# Altium PCB ESP32 Custom.PcbDoc (part 2 of 2)
Units mil, origin at the board's own origin, x right, y up, seen from the top; angles counter-clockwise.
Board outline 2700 x 1000 mil, 4 copper layers (L1, L2, L3, L4), stack 61.583 mil thick; 64 components, 73 nets, 299 pads, 161 vias.
Unrouted connection lines stored in the file: 215.
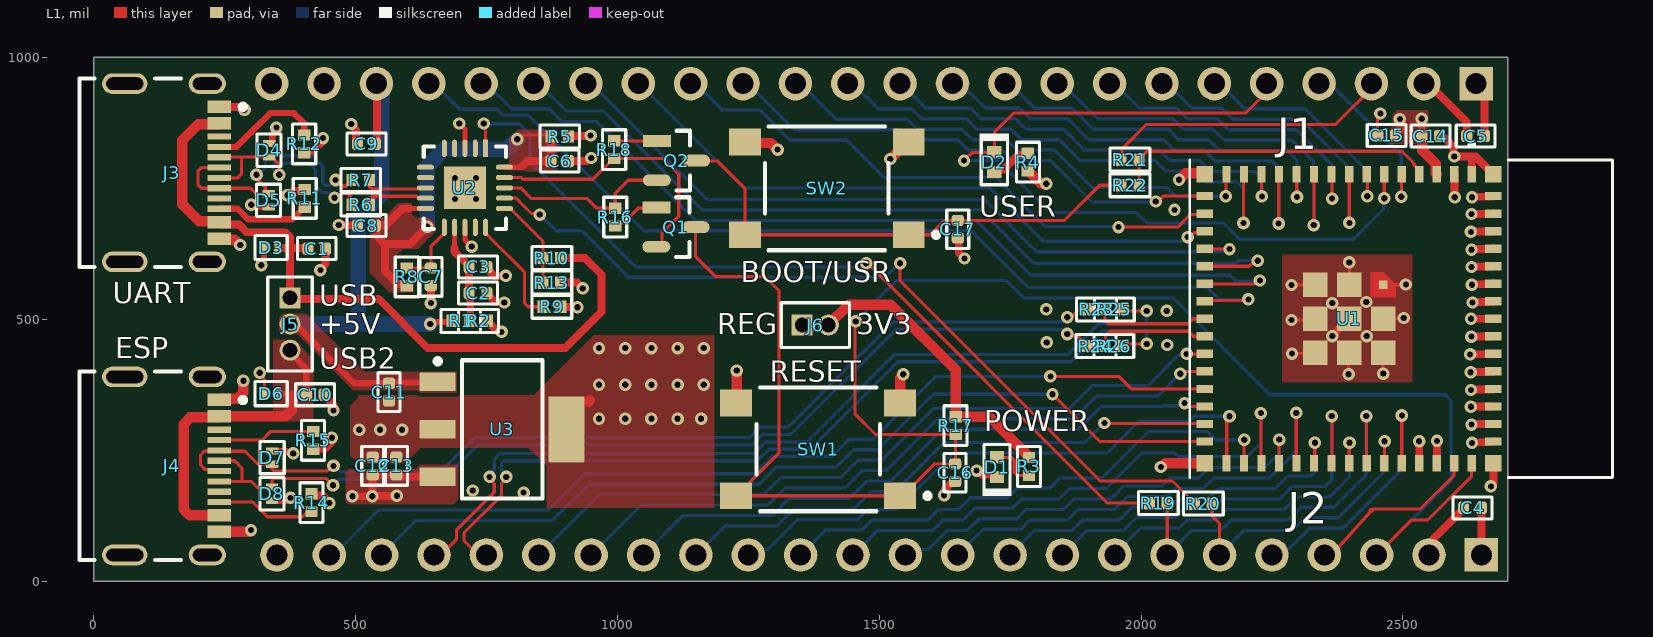
[diagram p0: L1 view]

## Part data (continued)
U3: "IC REG LINEAR 3.3V 1.5A SOT223-4", Case/Package=SOP, Dropout Voltage1-Max=550mV, Dropout Voltage1-Nom=340mV, LCSC Part Number=C181262, Manufacturer="Texas Instruments", Max Supply Voltage=20V, Min Input Voltage=3.8V, Operating Temperature, TJ-Max=125°C, Operating Temperature, TJ-Min=-40°C, Output Current1-Max=1.5A, Output Voltage1-Max=3.4V, Output Voltage1-Min=3.2V, Output Voltage1-Nom=3.3V, Package Body Material=Plastic, Package Shape=Rectangular, Package Style="SMALL OUTLINEMeter", Peak Reflow Temperature (Cel)=260°C, Supplier Part Number=296-24897-1-ND, Voltage Tolerance-Max=3%, Adjustability=FIXED, Category="Voltage Regulators - Linear", Channels=1, ComponentLink1Description=https://www.ti.com:443/lit/ds/symlink/tl1963a.pdf?src-supplier=IHS+Markit, ComponentLink1URL=https://www.ti.com:443/lit/ds/symlink/tl1963a.pdf?src-supplier=IHS+Markit, ComponentLink2Description=https://datasheet.ciiva.com/2046/-2046068.pdf?src-supplier=Digikey, ComponentLink2URL=https://datasheet.ciiva.com/2046/-2046068.pdf?src-supplier=Digikey, Height - Seated (Max)=1.8mm, JESD-30 Code=R-PDSO-G4, JESD-609 Code=e3, Length=6.5mm, Line Regulation-Max=0.01%, Load Regulation-Max=0.07%, Manufacturer Part Number=TL1963A-33DCYR, Moisture Sensitivity Level=2, Number of Outputs=1, Packaging="Tape and Reel", Pins=4, Pricing="1=2.91, 10=2.614, 25=2.4712, 100=2.1417, 250=2.03188, 500=1.8232, 1000=1.53764 (USD)", Qualification Status="Not Qualified", Reach SVHC Compliant=Yes, Regulator Type="FIXED POSITIVE SINGLE OUTPUT LDO REGULATOR", RoHS=Yes, RoHS Compliant=Yes, Stock=4105, Supplier=Digikey, Surface Mount=Yes, Technology=BIPOLAR, Terminal Finish=Tin, Terminal Form="Gull Wing", Terminal Pitch=2.3mm, Terminal Position=DUAL, Width=3.5mm, Input Voltage Absolute-Max=20V

## Via types
v1: diameter 23.62, hole 11.81, L1 to L4, tented both sides, 124 vias
v2: diameter 24, hole 12, L1 to L4, tented both sides, 37 vias

## Nets (pads, with @x,y where several pads share a name; then routed paths per layer and width w, separated by ;. In a path a pad name is that pad's centre, name@x,y a point inside that pad or via, vN(x,y) a via of type N, cw(c..) or ccw(c..) an arc to the next point about the centre after c; other vN are vias at no path point)
+3V3: C4.2 C5.2 C14.2 C15.2 J1.2 J2.1 J6.2 R2.1 R3.2 R4.2 R5.1 R17.2 U1.3 | length 4477.5
  L1 w15: R2.1 752.01,495.82 771.83,476 v1(779,476) ; R5.1 908.01,850 948,850 v1(949,851) ; C15.2 2485.93,852.18 2494.38,860.63 v1(2494.38,882.62) ; v1(2536,883) 2536.07,882.93 C14.2 ; J1.2@2550,950 2550,949 2622.07,876.93 C5.2 ; C4.2 2649.93,50.07 J2.1
  L1 w20: J6.2 1403,489.25 1441.75,528 1521.56,528 1646,403.56 R17.2 1709.89,314.01 1784.19,239.71 1784.19,236.64 1784.82,236.01 R3.2 ; R4.2 1784.63,782.36 1785.81,782.36 1808.48,759.69 1818.31,759.69 v1(1819,759) ; C14.2 2536.7,849.37 2536.7,823.06 2562.61,797.16 2562.61,778.72 U1.3
  L2 w15: v1(2494.38,882.62) 2494.57,882.81 2535.81,882.81 v1(2536,883)
  L2 w20: 2503,822 2567.15,757.85 2567.15,449.39 2596.88,419.65 2596.88,207.12 2650,154 J2.1
  L2 w40: v1(779,476) 787.13,476 828.81,517.68 828.81,609.36 814.19,623.98 814.19,651 814.19,779.19 819,784 886,851 971.13,851 972.13,850 1028,850 1145,733 1404,733 ; J6.2 1404,490 1404,733 ; J1.2@2550,950 2545.41,945.41 2545.41,892.41 v1(2536,883) 2536,855 2503,822 1882,822 v1(1819,759) 1793,733 1404,733
+3V3_FTDI: C6.2 C8.2 R5.2 R8.1 U2.10 U2.20 | length 868.7
  L1 w6: v1(809,844) 811.61,846.61 815.61,846.61 819,850 821,852 869.99,852 R5.2
  L1 w10.01: 601,711.63 U2.10 ; U2.20 816.19,790.37 819,793.18
  L1 w15: 557.94,679 C8.2 539.94,676.98 539.94,660.06 556,644 ; 557.94,679.94 589.63,711.63 601,711.63 ; R8.1 594.87,567.12 581.7,567.12 556,592.82 556,644 ; v2(637,677) 604,644 556,644 ; 819,793.18 827.82,802 C6.2 873.03,802.04 R5.2 R5.2
  L4 w30: v2(637,677) 637,792 670,825 790,825 v1(809,844)
+3V3_REG: C12.2 C13.2 J6.1 U3.3 | length 1227.2
  L1 w15: v1(494,162) v1(532,162) v1@532.5,162.5 ; v1@578.5,163.5 v1(579,163) 578.5,162.5 v1@532.5,162.5 ; C13.2@578.5,202.57 C13.2 C12.2 532.5,202.57 v1@532.5,162.5 ; C13.2@579.18,203.07 582.8,199.45 U3.3
  L2 w15: v1(494,162) 494.5,162.5 v1@532,162.5
  L2 w40: v1(579,163) 599,163 649,213 ; 1300.36,443.36 1346,489 J6.1
  L2 w60: 649,213 693,257 1170,257 1297,384 1297,440
+5V: C9.2 C11.2 J1.22 J5.2 R1.1 U3.1 | length 1242.1
  L1 w12: J5.2@375,500 375.91,500 497.98,377.93 C11.2 565.31,379.24 655.66,379.24 U3.1 ; v2(643,491) 646.25,491 650.25,495 681.99,495 R1.1
  L1 w15: C9.2 541.06,838.13 541.06,941.06 J1.22@550,950
  L4 w30: J5.2@376,490 377,491 505,491 ; J1.22@550,950 550,738.4 505,693.4 505,491 ; v2(643,491) 505,491
+5V_VBUS1: C1.2 D3.2 J3.A4B9 J3.B4A9 J5.1 R10.2 | length 1440.8
  L1 w15: J3.B4A9 243.95,681.12 277.42,681.12 292.17,666.37 365.63,666.37 375,657 375,634.03 ; D3.2 351.55,636.64 352.16,636.03 377,636.03 ; C1.2 408.04,636.03 377,636.03 ; R10.2 938,617 970,585 970,515 900,445 638.18,445 544.18,539 377,539 J5.1 375,634.03 ; 375,634.03 377,636.03
  L1 w20: J3.B4A9 237.83,687.24 201.47,687.24 169,719.72 169,842 199.6,872.6 237.83,872.6 J3.A4B9
+5V_VBUS2: C10.2 D6.2 J4.A4B9 J4.B4A9 J5.3 | length 633.3
  L1 w12: D6.2@352.16,356.99 378,356.99 C10.2@405.08,356.99 ; J5.3 375,437 406.07,405.93 C10.2
  L1 w15: D6.2 351.55,357.6 D6.2@352.16,356.99 ; C10.2@405.08,356.99 C10.2
  L1 w20: J4.B4A9 183.41,125.59 178,131 171.69,137.31 171.69,299.69 184.76,312.76 237.83,312.76 J4.A4B9 366.28,314.57 378,326.28 378,353.68
+VCC_FTDI: C2.2 C3.2 R1.2 R2.2 U2.12 | length 191.1
  L1 w10.01: 689,636 689.22,636.22 689.22,675.49 U2.12
  L1 w15: 689,636 689,629.25 717.07,601.18 C3.2 C2.2 718.99,548.08 R2.2@718.99,497
BTN_GPIO0: C17.2 Q2.3 R22.1 SW2.1 SW2.2 | length 961.6
  L1 w6: Q2.3 1151.42,802 1192,802 1243.5,750.5 SW2.2 SW2.1 1597.42,661.42 1624.93,688.93 C17.2 1853.93,688.93 1921,756 R22.1
CHIP_PU: C16.2 J2.3 Q1.3 R17.1 SW1.1 SW1.2 U1.45 | length 3442.9
  L1 w6: Q1.3 1149.42,619.58 1187,582 1281,582 1309,554 1309,244.99 1252.52,188.51 1252.52,183.59 1231.93,163 SW1.2 SW1.1 1544.92,163 1605.85,223.93 C16.2 1645.5,224.43 1645.5,279.49 R17.1 1493.01,279.99 1454,319 1454,495 v2(1455,496) ; J2.3 2517,117 2548,117 2631.29,200.29 2631.29,225.04 U1.45
  L4 w6: v2(1455,496) 1519.19,560.19 1519.47,560.19 1533.28,574 1742.86,574 1775.86,541 2060.99,541 2245.99,356 2580.92,356 2591.88,345.04 2591.88,191.88 J2.3
CON1_USB_N: D4.2 J3.A7 J3.B7 R6.1 | length 460.9
  L1 w6.03: J3.A7 275.08,770.08 282,777 282,809.72 ; J3.B7 239.91,809.72 282,809.72 ; v1(354.56,776) 354.56,795.36 339.92,810 D4.2 334.72,809.72 282,809.72 ; v1(460,732) 464.76,732 472.76,740 485,740 490,735 490,721.99 R6.1
  L4 w6.03: v1(354.56,776) 353.79,776 341.93,787.86 341.93,794.71 345.46,798.25 411.46,798.25 423.58,786.13 423.58,754.82 436.41,741.98 447.67,741.98 457.66,732 v1(460,732)
CON1_USB_P: D5.2 J3.A6 J3.B6 R7.1 | length 514.5
  L1 w6.03: J3.A6 205.76,789.76 199,783 199,757 205.61,750.39 J3.B6 239.83,750.2 299.8,750.2 311,739 330.68,739 331.47,739.8 327.6,743.67 327.6,752.2 314.44,765.36 314.44,772.36 v2(311,775.8) ; v2(462,766) 462.55,766 474.52,754.03 482.2,754.03 492.99,764.82 R7.1
  L4 w6.03: v2(311,775.8) 314.8,775.8 327.9,788.9 327.9,800.53 339.65,812.28 417.27,812.28 437.61,791.94 437.61,760.63 442.22,756.02 449.48,756.02 459.47,766 v2(462,766)
CON2_USB_N: D7.2 J4.A7 J4.B7 R23.1 | length 1917.3
  L1 w6.03: J4.A7 236.94,212.94 213.06,212.94 204,222 204,241 211.49,248.49 238.52,248.49 J4.B7 241.24,248 289,248 313.8,223.2 D7.2 341,223.03 341,213.56 344.53,210.03 445.48,210.03 455.45,220 v2(458,220) ; v2(1859,504) 1862.44,507.44 1870.44,507.44 1881.85,518.85 1897.84,518.85 R23.1
  L4 w6.03: v2(458,220) 459.03,220 470.52,208.52 562.03,208.52 563.03,207.52 661.15,207.52 727.66,274.03 1251.98,274.03 1272.06,294.11 1325.58,294.11 1526.51,495.03 1694.99,495.03 ; 1695.01,495.02 1846.48,495.02 1855.47,504 v2(1859,504)
CON2_USB_P: D8.2 J4.A6 J4.B6 R24.1 | length 1895.1
  L1 w6.03: J4.B6 283,190.55 ; J4.A6 269.08,229.92 283,216 283,190.55 ; v2(457,183) 457,183.47 444.47,196 343.98,196 340.45,192.47 D8.2 339.66,179 312,179 300.45,190.55 283,190.55 ; v2(1859,472) 1862.44,468.56 1878.61,468.56 1896.99,450.18 R24.1
  L4 w6.03: v2(457,183) 458.03,183 469.52,194.48 556.22,194.48 557.22,193.48 666.96,193.48 733.48,260 1257.79,260 1277.87,280.08 1331.39,280.08 1532.32,481 1689.18,481 1846.48,480.98 1855.47,472 v2(1859,472)
CON_ESP_USB_N: J2.21 R25.1 | length 1667
  L1 w6.03: J2.21 663,50 693.04,80.04 693.04,98.04 764.98,169.98 764.98,186.48 756,195.47 v2(756,199) ; R25.1 1969.01,516 v2(2011,516)
  L4 w6.03: v2(756,199) 756,202.53 764.98,211.52 764.98,232.28 776.74,244.03 1261.66,244.03 1283.68,266.05 1363.05,266.05 1530.03,433.03 1861.03,433.03 1919.51,491.52 2007.47,491.52 2011,495.05 v2(2011,516)
CON_ESP_USB_P: J2.20 R26.1 | length 1649.1
  L1 w6.03: J2.20 734.31,50 707.07,77.24 707.07,92.23 779.02,164.17 779.02,186.48 788,195.47 v2(788,199) ; R26.1 1969.01,453 v2(2011,453)
  L4 w6.03: v2(788,199) 788,202.53 779.02,211.52 779.02,226.47 782.55,230 1267.47,230 1289.49,252.02 1368.86,252.02 1535.84,419 1866.84,419 1925.33,477.48 2007.47,477.48 2011,473.95 2011,458.7 2008.15,455.85 v2(2011,453)
CON_GPIO0: J1.3 R21.1 | length 559.2
  L1 w6: R21.1 1963.95,806.96 1963.95,825.95 2010,872 2371,872 2449,950 J1.3@2450,950
DTR_FTDI: Q2.2 R16.1 U2.18 | length 346.5
  L1 w6: U2.18 815.5,751 836,730.5 942.5,730.5 960.99,712.01 R16.1 996,741 1020.6,765.6 Q2.2
ESP_USB_N: R23.2 R25.2 U1.23 | length 223.5
  L1 w6.23: R25.2@1931,524 1931,498 1937.62,491.38 2090.38,491.38 2100,501 U1.23
ESP_USB_P: R24.2 R26.2 U1.24 | length 215.6
  L1 w6.23: R24.2@1932.01,450 1932.01,468.01 1941.15,477.15 2089.85,477.15 2099.46,467.54 U1.24
FTDI_RESET: C7.2 R8.2 U2.11 | length 134.3
  L1 w6: R8.2 R8.2 643.96,597.97 C7.2 644,638.65 669.63,664.28 U2.11
FTDI_USB_N: R6.2 U2.9 | length 121.4
  L1 w6.03: R6.2 528,719.99 528,731.44 531.53,734.97 617.22,734.97 620.88,731.32 U2.9
FTDI_USB_P: R7.2 U2.8 | length 122.3
  L1 w6.03: R7.2 527,752.53 530.53,749 618.88,749 620.88,751 U2.8
GND: C1.1 C2.1 C3.1 C4.1 C5.1 C6.1 C7.1 C8.1 C9.1 C10.1 C11.1 C12.1 C13.1 C14.1 C15.1 C16.1 C17.1 D1.1 D3.1 D4.1 D5.1 D6.1 D7.1 D8.1 J1.1 J1.23 J2.2 J2.24 J3.A1B12 J3.B1A12 J3.S1 J3.S2 J3.S3 J3.S4 J4.A1B12 J4.B1A12 J4.S1 J4.S2 J4.S3 J4.S4 R9.2 R11.1 R12.1 R13.2 R14.1 R15.1 SW1.3 SW1.4 SW2.3 SW2.4 U1.1 U1.2 U1.42 U1.43 U1.46 U1.47 U1.48 U1.49 U1.50 U1.51 U1.52 U1.53 U1.54 U1.55 U1.56 U1.57 U1.58 U1.59 U1.60 U1.61 U1.62 U1.63 U1.64 U1.65 U1.66 U1.67 U1.68 U1.69 U1.70 U1.71 U1.72 U1.73 U2.3 U2.13 U2.21 U3.2 U3.4 | length 3311.9
  L1 w6: v1(317,398) 317,394.31 325.96,385.35 D6.1 ; v1(2287.25,498.59) 2287.65,498.98 U1.72@2330.86,498.98 ; v1(2287.25,565.59) 2287.65,565.98 U1.71@2330.86,565.98 ; v1(2288.25,434.59) 2288.65,434.98 U1.73@2331.86,434.98 ; U1.70@2396.02,438.86 2396.02,395.65 v1(2396.41,395.25) ; v1(2397.59,608.75) 2397.98,608.35 U1.69@2397.98,565.14 ; C15.1@2451.44,853.38 2451.44,883.75 2457,889.31 v1(2457,893) ; U1.67@2458.14,502.02 2501.35,502.02 v1(2501.75,502.41) ; U1.68@2462.02,439.86 2462.02,396.65 v1(2462.41,396.25) ; U1.66@2462.14,566.02 2505.35,566.02 v1(2505.75,566.41)
  L1 w10.01: v1(698,874) 709,863 U2.3 ; U2.13 709.23,675.35 709.23,651.58 v1(722,638.82)
  L1 w12: v1(301,718.8) 304.14,718.8 307.85,715.09 333.11,715.09 D5.1 ; v2(320,603) 320,606.25 325.07,611.32 325.07,636.17 D3.1 ; D4.1 335.89,836.48 340.81,836.48 340.81,854.67 349,862.86 v1(349,866) ; D7.1 341.71,247.91 367.95,247.91 369.63,246.22 378.78,246.22 v1(381,244) ; D8.1@343,153.41 367.26,153.41 372.86,159 v1(376,159)
  L1 w15: J3.A1B12 240.09,905.45 280.11,905.45 285.56,900 v2(288,900) ; v1(370,737) 372.33,737 380.21,744.88 399.87,744.88 R11.1 ; R12.1 405.13,821.12 418.3,821.12 436.35,839.17 436.35,844.35 v1(438,846) ; R14.1@415.93,167.08 419.13,163.88 436.9,163.88 450,150.78 v1(450,149) ; R15.1 420.36,253.35 441.9,253.35 453.35,264.8 453.35,272.35 v1(455,274) ; v2(433,594) 433,596.44 442.93,606.36 C1.1 ; C10.1 439.93,354.82 458,336.75 v1(458,326) ; v1(468,680) 468.5,679.5 502.57,679.5 C8.1@504.07,678 ; v1(492,873) 492,870.67 500.94,861.73 C9.1@500.94,836 ; v1(644,531) C7.1 ; C2.1 750.93,548.82 766.1,533.65 782.35,533.65 v1(784,532) ; C3.1 754.06,596.87 754.06,593.94 765,583 v1(787,583) ; R9.2 892.51,523.5 923.5,523.5 v1(924,523) ; R13.2 923,570 928.99,564.01 v1(934,559) ; C6.1 941.67,802 947.67,808 v1(950,808) ; v1(1624,164) 1625.65,165.65 1625.65,175.49 1637.1,186.94 1641.87,186.94 C16.1 ; C17.1@1651.81,654.44 1651.81,627.19 v1(1663,616) ; v1(1686,211) 1688.33,211 1696.02,203.31 1720.69,203.31 D1.1 ; v1(2365,468) 2365,468.59 U1.61 ; v1(2531,267) 2531.27,266.73 U1.42 ; J2.2 2559.38,59.38 2559.38,82.12 2616.07,138.82 C4.1 ; v1(2565.07,267.82) 2565.34,267.55 U1.43@2565.34,226.23 ; C14.1 2569.93,848.82 2573.06,845.69 2580.31,845.69 2596.35,829.65 2596.35,812.65 v1(2598,811) 2631,811 ; U1.2@2598.56,776.62 2598.56,733.4 v1(2598.96,733.01) ; v1(2628.48,433.04) 2628.75,433.31 U1.51@2673,433.31 ; v1(2629.3,398.97) 2629.57,399.24 U1.50@2670.89,399.24 ; v1(2629.82,332.93) 2630.19,333.3 2672.63,333.3 U1.48 ; v1(2629.82,666.93) 2630.52,667.63 2672.3,667.63 U1.58 ; v1(2630,365) 2631.07,366.07 2671.93,366.07 U1.49 ; v1(2630,501) U1.53 ; v1(2630.82,466.93) 2631.12,467.23 2672.7,467.23 U1.52 ; v1(2631,299) 2632.21,300.21 U1.47 ; v1(2631,600) 2631.7,600.7 2672.3,600.7 U1.56 ; v1(2631,633) 2631.93,633.93 2670.86,633.93 U1.57@2672.39,635.46 ; v1(2631,701) 2631.39,701.39 2672.61,701.39 U1.59 ; U1.1 2631.66,810.34 2631,811 ; v1(2631.82,565.93) 2632.82,566.93 2671.07,566.93 U1.55@2672.53,568.4 ; v1(2632,264) 2633.37,265.37 2671.63,265.37 U1.46 ; v1(2632,733) 2633.13,734.13 2671.01,734.13 U1.60@2671.86,734.98 ; v1(2633,532) 2634.23,533.23 2671.77,533.23 U1.54 ; J1.1@2650,950 2655.93,944.07 C5.1 ; v1(2668,181) 2668,183.33 2673,188.33 U1.65 ; U1.62 2638.59,811 2631,811
  L1 w20: J4.B1A12 296.13,94.09 299.59,97.55 v1(300.57,97.55) ; J4.A1B12 241.45,347.87 274.28,347.87 286,359.59 v1(286,382.65) ; J3.B1A12 241.45,652.13 268.89,652.13 279.02,642 v1(280,642) ; 945.27,342.99 947.28,345 ; SW1.4@1228,336.17 v1(1228,402) ; SW2.4 1245.39,836.7 1292.61,836.7 1305.31,824 v1(1306,824) ; v1(1521,806) 1557,842 1557,838.08 SW2.3 ; SW1.3 1540,388.02 1546,394.02 v1(1546,395) ; C17.1 1651.18,655.07 C17.1@1651.81,654.44 ; v1(2038,218) 2038.98,218 2046.18,225.2 2116.07,225.2 2116.28,225.41 U1.64 ; v1(2072.5,766.5) 2085,779 2119.41,779 U1.63
  other v1: 821,169 724,173 507,289 547,289 589,289 965,310 1015,310 1065,310 1115,310 1160,310 965,375 1015,375 1065,375 1115,375 1165,375 965,445 1015,445 1065,445 1115,445 1165,445 2050,451 1820,456 2431,468 2049,516 1819,519 2365,531 2430,533 2064,709 690,730 730,730 690,770 730,770
GPIO0: R21.2 R22.2 U1.4 | length 616.6
  L1 w6: R22.2 R21.2 1996.01,806.18 2001.64,811.81 2002.82,811.81 2012.01,821 2498.23,821 2520.68,798.55 2520.68,795.06 2531.27,784.46 U1.4
GPIO1: J1.4 U1.5 | length 326.3
  L1 w6: v2(2497,734) 2497.4,734.4 2497.4,776.19 U1.5
  L4 w6: J1.4@2350,950 2361,950 2497,814 v2(2497,734)
GPIO2: D2.1 J1.5 U1.6 | length 1628.9
  L1 w6: v1(1662,803) 1677.7,818.7 D2.1 1720,857 1757,894 2200,894 2250,944 J1.5@2250,950 ; v1(2464.34,731.34) U1.6
  L4 w6: v1(1662,803) 1727.29,803 1826.29,704 1990,704 1990.19,703.81 1991.11,703.81 2010.92,684 2157.39,684 2188.49,652.9 2405.08,652.9 2409.18,657 2410.14,657 2463,709.86 2463,730 v1(2464.34,731.34)
GPIO3: J1.6 U1.7 | length 442.8
  L1 w6: U1.7@2430.44,774.76 U1.7@2431.63,775.96 ; v2@2432.4,735.4 U1.7@2432.4,777.19
  L4 w6: J1.6@2150,950 2198,902 2313.28,902 2432,783.28 v2(2432,735)
GPIO4: J1.7 U1.8 | length 612.5
  L1 w6: U1.8 2397.7,776.3 2397.7,684.3 v2(2398,684)
  L4 w6: J1.7@2050,950 2097,903 2154,903 2175,882 2305,882 2398,789 v2(2398,684)
GPIO5: J1.8 U1.9 | length 582.1
  L1 w6: v2@2364.38,731.03 U1.9@2364.38,770.35
  L4 w6: J1.8@1950,950 1997,903 2068.72,903 2088.72,883 2145.72,883 2166.72,862 2296.72,862 2364.82,793.9 v2(2364.82,730.59)
GPIO6: J1.9 U1.10 | length 754.4
  L1 w6: v2@2329.97,680.19 U1.10@2329.97,772.19
  L4 w6: J1.9@1850,950 1917,883 2060.43,883 2080.43,863 2137.43,863 2158.43,842 2288.43,842 2329.67,800.76 v2(2329.67,679.89)
GPIO7: J1.10 U1.11 | length 718.2
  L1 w6: v2@2297.38,734.03 U1.11@2297.38,773.35
  L4 w6: J1.10@1750,950 1797,903 1868.72,903 1908.72,863 2052.15,863 2072.15,843 2129.15,843 2150.15,822 2280.15,822 2297.82,804.33 v2(2297.82,733.59)
GPIO8: J1.11 U1.12 | length 877.9
  L1 w6: v2@2262.97,683.19 U1.12@2262.97,775.19
  L4 w6: J1.11@1650,950 1656,950 1703,903 1768.72,903 1788.72,883 1860.43,883 1900.43,843 2043.86,843 2063.86,823 2120.86,823 2141.86,802 2250.35,802 2262.67,789.67 v2(2262.67,682.89)
GPIO9: J1.12 U1.13 | length 834.5
  L1 w6: v2@2230.38,735.03 U1.13@2230.38,774.35
  L4 w6: J1.12@1550,950 1550,942 1589,903 1674.72,903 1694.72,883 1760.43,883 1780.43,863 1852.15,863 1892.15,823 2035.58,823 2055.58,803 2112.58,803 2133.58,782 2218.35,782 2230.82,769.53 v2(2230.82,734.59)
GPIO10: J1.13 U1.14 | length 986.4
  L1 w6: v2@2195.97,684.19 U1.14@2195.97,776.19
  L4 w6: J1.13@1450,950 1498,902 1561.72,902 1580.72,883 1666.43,883 1686.43,863 1752.15,863 1772.15,843 1843.86,843 1883.86,803 2027.29,803 2047.29,783 2104.29,783 2125.29,762 2183.28,762 2195.67,749.61 v2(2195.67,683.89)
GPIO11: J1.14 U1.15 | length 943
  L1 w6: v2(2162,735) 2162.58,735.58 2162.58,775.55 U1.15@2163.38,776.35
  L4 w6: J1.14@1350,950 1418,882 1553.43,882 1572.43,863 1658.15,863 1678.15,843 1743.86,843 1763.86,823 1835.58,823 1906.73,751.85 2049.14,751.85 2052.99,748 2053.08,748 2066.08,735 v2(2162,735)
GPIO12: J1.15 U1.16 | length 970.1
  L1 w6: v1(2028,725) 2030.61,727.61 2034.61,727.61 2042.25,735.25 U1.16
  L4 w6: J1.15@1250,950 1338,862 1545.15,862 1564.15,843 1649.86,843 1669.86,823 1735.58,823 1755.58,803 1827.29,803 1906.29,724 2027,724 v1(2028,725)
GPIO13: J1.16 U1.17 | length 1093.6
  L1 w6: v1(1957,676) 2070.08,676 2094.47,700.39 2120.42,700.39 U1.17
  L4 w6: J1.16@1150,950 1200,900 1271.72,900 1329.72,842 1438,842 1509,771 1723,771 1817,677 v1@1955,677
GPIO14: J1.17 U1.18 | length 1209.2
  L1 w6: v1(2089,657) 2092.69,657 2101.13,665.45 2118.94,665.45 U1.18
  L4 w6: J1.17@1050,950 1050,942 1241,751 1711,751 1813,649 2077.31,649 2085.31,657 v1(2089,657)
GPIO15: J1.18 U1.19 | length 1401.6
  L1 w6: U1.19 2122.25,634.43 2168.57,634.43 v1(2169,634)
  L4 w6: J1.18@950,950 1171,729 1701,729 1801,629 2156.33,629 2158.72,631.39 2166.39,631.39 v1(2169,634)
GPIO16: J1.19 U1.20 | length 1622.9
  L1 w6: U1.20 2122.02,601.2 2206.51,601.2 2214.71,609.39 2220.39,609.39 v1(2223,612)
  L4 w6: J1.19@850,950 902,898 973,898 1162,709 1692.72,709 1794.72,607 2179.92,607 2184.92,612 v1(2223,612)
GPIO17: J1.20 U1.21 | length 1741.7
  L1 w6: U1.21 2122.28,567.46 2216.78,567.46 2223.31,574 v1(2227,574)
  L4 w6: J1.20@750,950 798,902 869.72,902 893.72,878 960,878 1149,689 1684.43,689 1789.24,584.19 2169.81,584.19 2181,573 2226,573 v1(2227,574)
GPIO18: J1.21 U1.22 | length 1810.3
  L1 w6: U1.22 2123.59,536.23 2203.23,536.23 v1(2205,538)
  L4 w6: J1.21@650,950 699,901 770.72,901 781.72,890 829.92,890 1050.92,669 1676.15,669 1784.15,561 2126,561 2149,538 v1(2205,538)
GPIO21: J2.19 U1.25 | length 1430.9
  L1 w6: v1(2087,434) v1(2087,434) U1.25@2121.78,434.04 ; U1.25@2121.78,434.04 U1.25
  L4 w6: J2.19 965.14,165.14 1279.01,165.14 1311.86,198 1426.58,198 1459.58,231 1505.15,231 1604.15,330 1863.52,330 1907.19,373.68 2013.68,373.68 2071.39,431.39 2084.39,431.39 v1(2087,434)
GPIO26: J2.18 U1.26 | length 1317
  L1 w6: v1(2075,396) 2078.69,396 2083.29,400.61 U1.26
  L4 w6: J2.18 1045.14,145.14 1287.29,145.14 1320.15,178 1434.86,178 1467.86,211 1513.43,211 1612.43,310 1871.8,310 1915.48,353.68 2032.68,353.68 v1(2075,396)
GPIO33: J2.17 U1.28 | length 1194.6
  L1 w6: v1(2083,340) 2086.69,340 2093.01,333.68 U1.28
  L4 w6: J2.17 1125.14,125.14 1295.57,125.14 1328.43,158 1443.15,158 1476.15,191 1521.72,191 1620.72,290 1880.08,290 1923.76,333.68 2040.96,333.68 2042.28,335 2070.33,335 2072.72,337.39 2080.39,337.39 v1(2083,340)
GPIO34: J2.16 U1.29 | length 1076.9
  L1 w6: v1(1930,302) 1930.89,301.11 2120.93,301.11 U1.29
  L4 w6: J2.16 1205.14,105.14 1303.86,105.14 1336.72,138 1451.43,138 1484.43,171 1530,171 1612,253 1612.08,253 1623.08,264 1632.72,264 1633.53,264.81 1892.81,264.81 v1(1930,302)
GPIO35: J2.15 U1.31 | length 1118.9
  L1 w6: U1.31@2163.58,227.1 2163.58,305.79 2169,311.21 v2(2169,315)
  L4 w6: J2.15 1260.33,60.33 1287.33,60.33 1345,118 1459.72,118 1478.72,137 1534,137 1641.81,244.81 1935.81,244.81 1997,306 2093.24,306 2102.24,315 v2(2169,315)
GPIO36: J2.14 U1.32 | length 990.7
  L1 w6: U1.32@2196.56,230.24 v2@2196.56,269.56
  L4 w6: J2.14 1398,98 1468,98 1487,117 1593.72,117 1613.72,137 1652.15,137 1674.29,159.14 1746.01,159.14 1764.93,178.07 1826.99,178.07 1845.92,197 1925.29,197 2014.29,286 2126,286 2142,270 v2(2197,270)
GPIO37: J2.13 U1.33 | length 1022.2
  L1 w6: U1.33@2229.3,228.7 v2@2229.3,320.7
  L4 w6: J2.13 1497,97 1602,97 1622,117 1660.43,117 1682.57,139.14 1754.29,139.14 1772.15,157 1843.86,157 1863.86,177 1933.58,177 2001.39,244.81 2064.27,244.81 2070.89,238.19 2203.37,238.19 2229,263.82 v2(2229,321)
GPIO38: J2.12 U1.34 | length 859.9
  L1 w6: U1.34@2263.71,230.54 v2@2263.71,269.86
  L4 w6: J2.12 1560.33,60.33 1593.86,60.33 1630.53,97 1668.72,97 1690.86,119.14 1762.57,119.14 1780.43,137 1852.15,137 1872.15,157 1941.86,157 1966.43,181.57 2040.15,181.57 2055.58,197 2110.58,197 2130.58,217 2236.72,217 2263.02,243.3 2263.02,269.18 v2(2264.14,270.3)
GPIO39: J2.11 U1.35 | length 893.4
  L1 w6: U1.35@2296.44,229.01 v2@2296.44,321.01
  L4 w6: J2.11 1699.14,99.14 1770.86,99.14 1788.72,117 1860.43,117 1880.43,137 1950.15,137 1974.72,161.57 2048.43,161.57 2063.86,177 2118.86,177 2138.86,197 2245,197 2296.14,248.14 v2(2296.14,321.3)
GPIO40: J2.10 U1.36 | length 743.1
  L1 w6: U1.36@2331.71,224.54 v2@2331.71,263.86
  L4 w6: J2.10 1797,97 1868.72,97 1888.72,117 1958.43,117 1983,141.57 2056.72,141.57 2072.15,157 2127.15,157 2147.15,177 2256.58,177 2280.58,201 2325,201 2332.14,208.14 v2(2332.14,264.3)
GPIO41: J2.9 U1.37 | length 787.5
  L1 w6: U1.37@2364.44,223.01 v2@2364.44,315.01
  L4 w6: J2.9 1897,97 1966.72,97 1991.29,121.57 2065,121.57 2080.43,137 2135.43,137 2155.43,157 2264.86,157 2288.86,181 2351.86,181 2364.14,193.28 v2(2364.14,315.3)
GPIO42: J2.8 U1.38 | length 615.7
  L1 w6: U1.38@2397.71,224.54 v2@2397.71,263.86
  L4 w6: J2.8 1950,52 1999.57,101.57 2073.29,101.57 2088.72,117 2143.72,117 2163.72,137 2273.15,137 2297.15,161 2360.15,161 2398.14,199 v2(2398.14,264.3)
GPIO45: J2.5 U1.41 | length 509.3
  L1 w6: U1.41 2497.97,225.58 2497.97,316.13 v2(2498.14,316.3)
  L4 w6: J2.5 2260.33,60.33 2281.33,60.33 2322,101 2385,101 2497.8,213.8 2497.8,225.41 2498.14,225.75 v2(2498.14,316.3)
GPIO46: J2.4 U1.44 | length 337
  L1 w6: J2.4 2363.69,50 2366.82,53.13 2439.47,134.53 2439.67,134.73 2442.6,137.66 2533.3,137.66 2597.82,202.18 2597.82,225.04 U1.44
GPIO47: J2.23 U1.27 | length 1822.9
  L1 w6: v1(1827,391) 1957.45,391 1981.31,367.14 U1.27
  L4 w6: J2.23 459,50 545,136 868.72,136 937.86,205.14 1262.44,205.14 1295.29,238 1410.01,238 1443.01,271 1488.58,271 1608.58,391 v1(1827,391)
GPIO48: J2.22 U1.30 | length 1736.4
  L1 w6: v1(1831,357) 1921.25,266.75 U1.30
  L4 w6: J2.22 616,116 877,116 946.14,185.14 1270.72,185.14 1303.58,218 1418.29,218 1451.29,251 1496.86,251 1602.86,357 v1(1831,357)
NetD1_2: D1.2 R3.1 | length 88.5
  L1 w6: D1.2 1752.14,236.4 1758,230.54 1758,207.85 1763.86,201.99 R3.1
NetD2_2: D2.2 R4.1 | length 78.8
  L1 w15: D2.2 1724.31,785.61 1737.25,785.61 1765.52,813.88 1780.87,813.88 R4.1
NetJ3_A5: J3.A5 R12.2 | length 219.4
  L1 w12: J3.A5 272.8,829.13 307,863.33 337.48,893.81 382.19,893.81 402,874 R12.2
NetJ3_B5: J3.B5 R11.2 | length 180.9
  L1 w12: J3.B5 275.1,711.02 294.81,691.31 379.14,691.31 401.82,713.99 R11.2
NetJ4_A5: J4.A5 R15.2 | length 185.7
  L1 w6: J4.A5 321.4,269.29 338.11,286 R15.2@418.44,286
NetJ4_B5: J4.B5 R14.2 | length 193.2
  L1 w6: J4.B5 303.56,151.18 331.74,123 398.83,123 413.82,137.99 R14.2@415,137.99
NetQ1_1: Q1.1 R16.2 | length 93.2
  L1 w6: R16.2 1001.63,683.62 1011.62,683.62 1040,712 1073.18,712 Q1.1
NetQ2_1: Q2.1 R18.2 | length 81.8
  L1 w6: R18.2 994.3,840.7 1075.27,840.7 Q2.1
NetR9_1: R9.1 U2.15 | length 213.4
  L1 w6: U2.15 748.37,664.28 761.65,651 823,589.65 823,531 830,524 R9.1
RTS_FTDI: Q1.2 R18.1 U2.19 | length 521.6
  L1 w6: U2.19 816.5,770.68 819.68,767.5 953.33,767.5 992.82,806.99 1086.78,806.99 1117.29,776.48 1117.29,696.93 1085.23,664.86 1085.23,644.38 1079.44,638.6 Q1.2
RXD_FTDI: R19.2 U2.1 | length 1656.3
  L1 w6: v1(745,874) 745,870.31 746.31,869 748.37,866.94 U2.1 ; v1(1475,607) 1477.92,607 1935.92,149 R19.2
  L4 w6: v1(745,874) 745.54,873.46 813.48,873.46 817.94,869 819,867.94 833,853.94 833,802 1034.81,600.19 1464.5,600.19 1471.31,607 v1(1475,607)
TXD_FTDI: R20.2 U2.17 | length 1602.7
  L1 w6: U2.17 806.69,731.32 819,719 836.04,701.96 850.04,701.96 v1(852,700) ; v1(1540,607) 1540,573.2 1922.01,191.19 2059.98,191.19 2101.99,149.18 R20.2
  L4 w6: v1(852,700) 883,669 931.72,669 1020.53,580.19 1511.19,580.19 v1@1540,609
U0RXD: J2.6 R20.1 U1.40 | length 584.4
  L1 w6: R20.1 2136.01,123.99 2150,110 J2.6 ; U1.40 2464.67,225.74 2464.67,266.67 v2(2465,267)
  L4 w6: J2.6 2197,97 2289.72,97 2313.72,121 2376.72,121 2465,209.28 v2(2465,267)
U0TXD: J2.7 R19.1 U1.39 | length 747
  L1 w6: J2.7 R19.1 ; U1.39@2430.44,223.01 v2@2430.44,315.01
  L4 w6: J2.7 2097,97 2152,97 2172,117 2281.43,117 2305.43,141 2368.43,141 2430.14,202.71 v2(2430.14,315.3)
VBUS_SENSE: R10.1 R13.1 U2.16 | length 178.7
  L1 w6: U2.16 795.72,711.63 857.99,649.35 R10.1 R13.1
pads on no net: J1.24 J3.A8 J3.B8 J4.A8 J4.B8 U2.2 U2.4 U2.5 U2.6 U2.7 U2.14

## Polygon pours and split planes (outlines as drawn)
GND on L1 "NONET_L-01_P-001" (solid, pour order 17): 505,355 505,350 490,335 490,240 505,225 595,225 625,255 830,255 865,220 865,140 1185,140 1185,470 955,470 840,355 740,355
GND on L1 "GND_L01_P010" (solid, pour order 10): 2270,380 2512,380 2518,380 2518,623 2270,623
+5V_VBUS2 on L1 "+5V_VBUS2_L01_P009" (solid, pour order 9): 384.88,461 419,422.14 419,305 343,305 343,461
+5V on L1 "L1-+5V" (solid, pour order 7): 619,365 624,360 693,360 693,400 517,400 406,511 362,511 354,503 354,471 390,471 496,365
+3V3_REG on L1 "+3V3_REG_L01_P004" (solid, pour order 4): 481,151 485,147 687,147 696,156 696,222 623,222 618,217 615,214 487,214 481,208 481,168 481,208 481,168
+3V3_FTDI on L1 "+3V3_FTDI_L01_P002" (solid, pour order 2): 554,694 582,722 607,722 607,701 614,694 641,694 650,685 650,665 620,635 601,635 598,635 595,635 591,635 576,620 576,583 584,575 611,575 611,552 564,552 527,589 527,694
+3V3_FTDI on L1 "+3V3_FTDI_L01_P001" (solid, pour order 1): 823,785 825,783 885,783 885,862 810,862 794,846 794,785
+3V3 on L1 "+3V3_L01_P000" (solid, pour order 0): 2533,899 2534,899 2488,899 2481,892 2481,869 2475,863 2475,835 2548,835 2548,899
GND on L2 "NONET_L-01_P-001" (solid, pour order 20): 2682,18 2682,982 2680,980 8,980 8,19.4 7.9,19.31
+3V3 on L2 "+3V3_L2" (solid, pour order 16): 2682,18 2682,982 915,982 914,981 914,830 978,830 1122,686 1252,686 1383,555 1383,466 1430,466 1430,645 1483.74,698.74 1810.74,698.74 1903,791 2094,791 2100,797 2472,797 2531,738 2531,209 2359,209 2311,154.03 2311,18
+3V3_REG on L2 "+3V3_REG_L02_P019" (solid, pour order 19): 481,143 697,143 697,221 481,221
GND on L3 (split plane): 2679.9,20.1 20.1,20.1 20.1,979.9 2679.9,979.9

## Silkscreen, mask and mechanical layers (free items; w line width, h text height)
Top Overlay:
  text "J1" at 2260,825 h60
  text "USER" at 1691,696 h40
  text "BOOT/USR" at 1236,571 h40
  text "UART" at 36,531 h40
  text "USB" at 431,526 h40
  text "+5V" at 431,471 h40
  text "REG" at 1191,471 h40
  text "3V3" at 1456,471 h40
  text "ESP" at 41,426 h40
  text "USB2" at 431,406 h40
  text "RESET" at 1291,381 h40
  text "POWER" at 1701,286 h40
  text "J2" at 2280,110 h60
Bottom Overlay:
  text "GND" at 2674,869 h40 r90
  text "NC" at 363.46,865.77 h40 r90
  text "5V" at 558.46,865.77 h40 r90
  text "GND" at 464,864 h40 r90
  text "IO18" at 664,864 h40 r90
  text "IO17" at 764,864 h40 r90
  text "IO16" at 864,864 h40 r90
  text "IO15" at 969,864 h40 r90
  text "IO14" at 1069,864 h40 r90
  text "IO0" at 2474,864 h40 r90
  text "3V3" at 2569,864 h40 r90
  text "IO13" at 1169,859 h40 r90
  text "IO12" at 1274,859 h40 r90
  text "IO11" at 1369,859 h40 r90
  text "IO2" at 2269,859 h40 r90
  text "IO10" at 1469,854 h40 r90
  text "IO9" at 1569,854 h40 r90
  text "IO8" at 1659,854 h40 r90
  text "IO5" at 1969,854 h40 r90
  text "IO3" at 2169,854 h40 r90
  text "IO1" at 2369,854 h40 r90
  text "IO7" at 1764,849 h40 r90
  text "IO6" at 1874,849 h40 r90
  text "IO4" at 2069,849 h40 r90
  text "IO35" at 1274,274 h40 r90
  text "IO38" at 1569,274 h40 r90
  text "IO48" at 469,269 h40 r90
  text "USB-" at 669,269 h40 r90
  text "USB+" at 769,269 h40 r90
  text "IO26" at 964,269 h40 r90
  text "IO33" at 1064,269 h40 r90
  text "IO34" at 1169,269 h40 r90
  text "IO36" at 1369,269 h40 r90
  text "IO37" at 1469,269 h40 r90
  text "IO39" at 1674,269 h40 r90
  text "IO40" at 1769,269 h40 r90
  text "IO42" at 1969,269 h40 r90
  text "IO45" at 2269,269 h40 r90
  text "IO46" at 2359,269 h40 r90
  text "IO48" at 569,264 h40 r90
  text "IO21" at 869,264 h40 r90
  text "IO41" at 1869,259 h40 r90
  text "3V3" at 2669,244 h40 r90
  text "GND" at 369,239 h40 r90
  text "TXD" at 2069,239 h40 r90
  text "RXD" at 2174,239 h40 r90
  text "GND" at 2569,239 h40 r90
  text "EN" at 2464,199 h40 r90
Board Shape:
  the board outline again, w20